# Altium PCB CP125-(12V2A)_Weld_V1.0.PcbDoc
Units mm, origin at the board's own origin, x right, y up, seen from the top; angles counter-clockwise.
Board outline 65 x 35 mm, 2 copper layers (Top Layer, Bottom Layer); 44 components, 28 nets, 104 pads, 0 vias.
Unrouted connection lines stored in the file: 75.
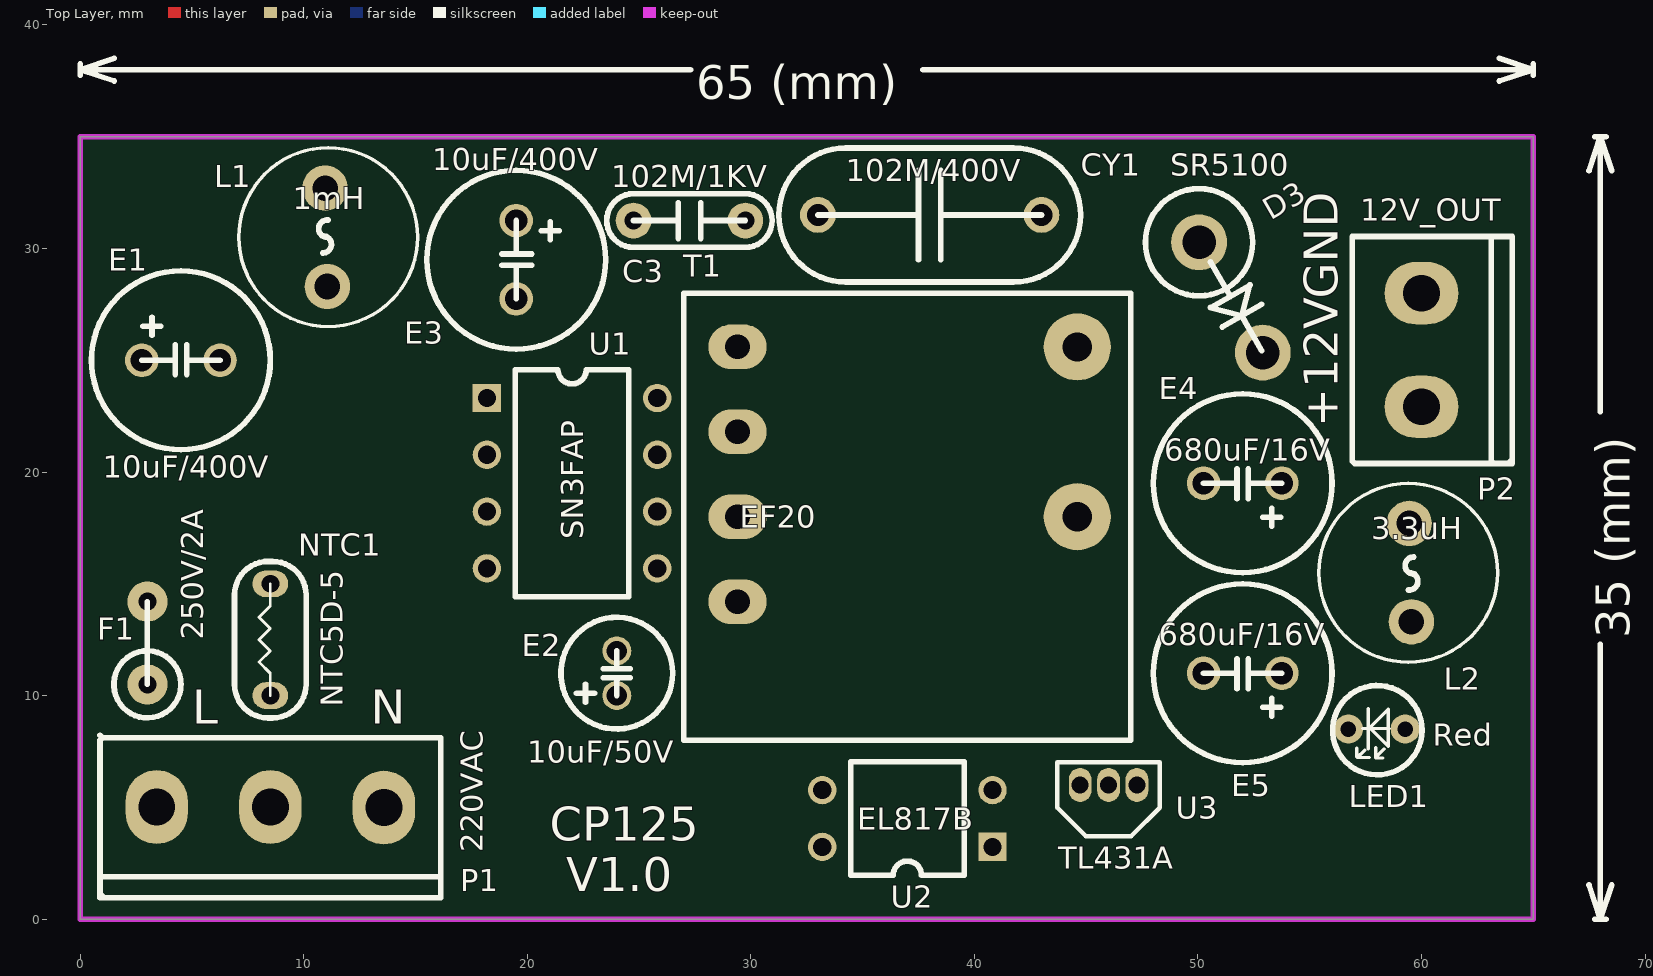
[diagram p0: Top Layer view]
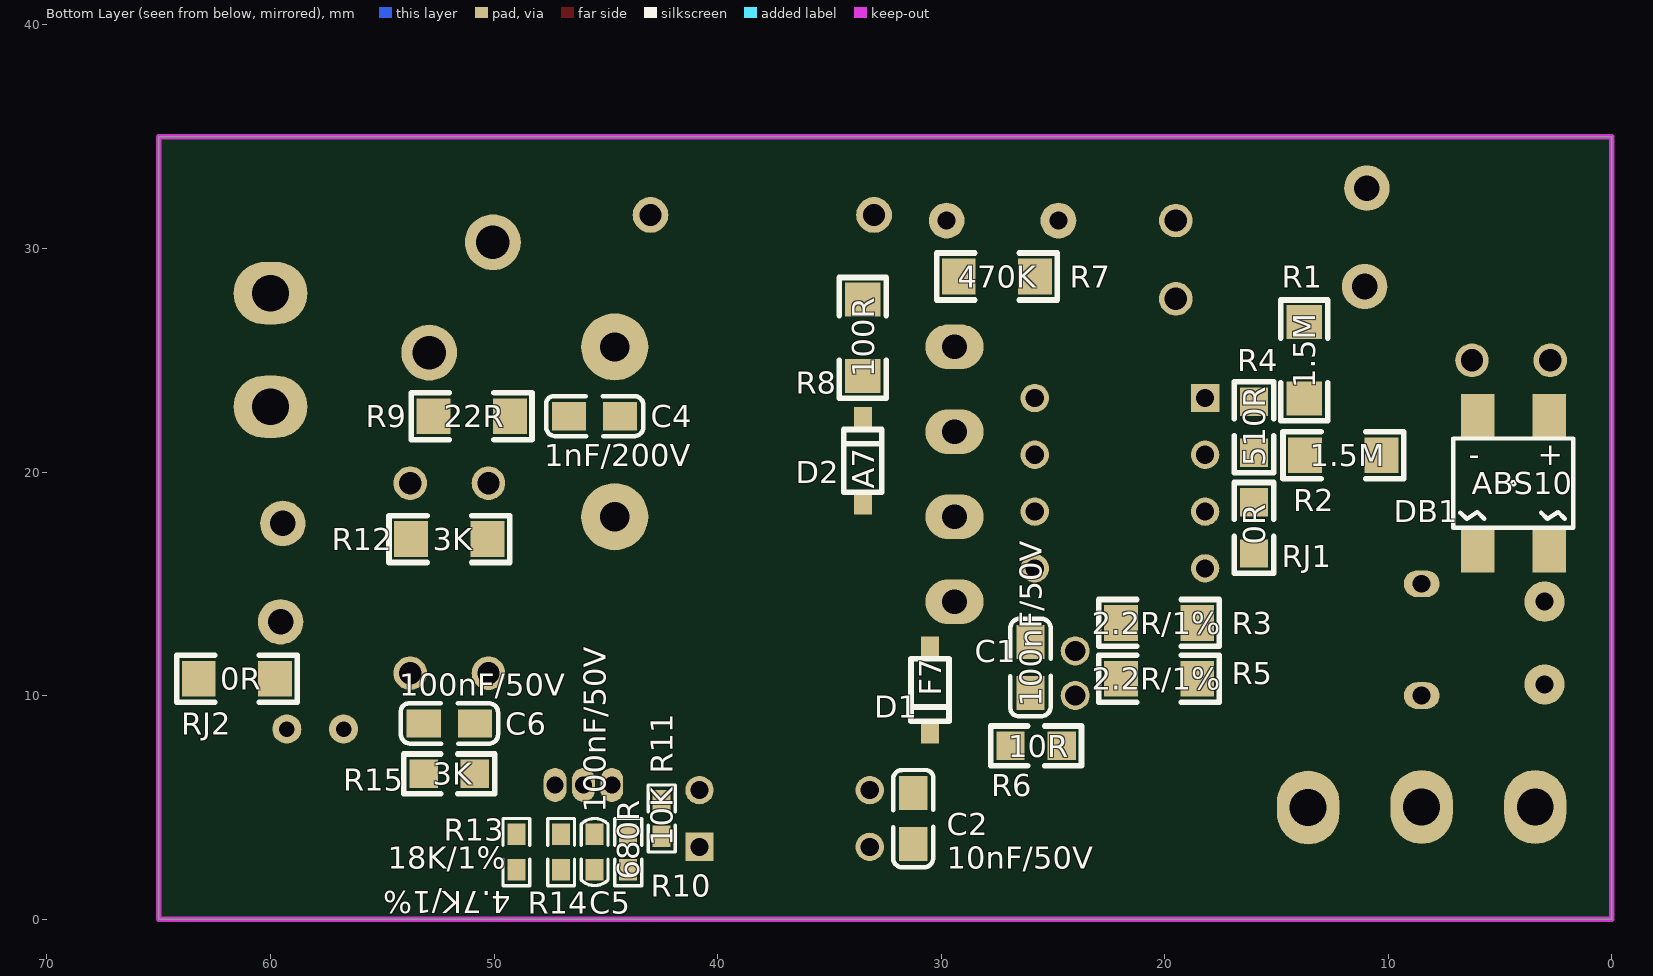
[diagram p1: Bottom Layer view, seen from below]

## Layer stack, top to bottom
Top Layer: signal copper 0.0356
Dielectric: dielectric 0.32, FR-4, Dk 4.8
Bottom Layer: signal copper 0.0356

## Board outline
0,0 65,0 65,35 0,35

## Design rules (kind name [scope] priority, off if disabled: settings)
Clearance [All] p1: gap=0.254
MinimumSolderMaskSliver [All] p1: minsoldermaskwidth=0
PolygonConnect [All] p1: connectstyle=Relief reliefconductorwidth=0.254 reliefentries=4 polygonreliefangle="90 Angle"
RoutingVias [All] p1: holewidth=0.711 width=1.27 viastyle="Through Hole" minholewidth=0.711 minwidth=1.27 maxholewidth=0.711 maxwidth=1.27
SilkToSilkClearance [All] p1: silktosilkclearance=0
SilkscreenOverComponentPads [All] p1: minsilkscreentomaskgap=0
SolderMaskExpansion [All] p1: expansion=0.102
Width [All] p1: maxlimit=100 minlimit=0.2 preferedwidth=0.254
25 further rules are at their usual default settings.

## Components (designator, comment, footprint, x,y, rotation, side; value= is the part's Value field where it differs from the comment)
C1 "100nF/50V" 0805_C1 26,11.25 r270 bottom
C2 "10nF/50V" 0805_C1 31.25,4.5 r90 bottom
C3 "102M/1KV" CY-5MM 27.25,31.25 r0 top
C4 "1nF/200V" 0805_C1 45.5,22.5 r0 bottom
C5 "100nF/50V" 0603_CN 45.5,3 r270 bottom
C6 "100nF/50V" 0805_C1 52,8.75 r0 bottom
CY1 "102M/400V" CY-10MM 38,31.5 r0 top
D1 "F7" SOD-123 30.5,10.25 r90 bottom
D2 "A7" SOD-123 33.5,20.5 r270 bottom
D3 "SR5100" DO-201AD-1 50.5,29.5 r300 top
DB1 "ABS10" ABS10 6,16.5 r90 bottom
E1 "10uF/400V" CS_470uF/16V 4.5,25 r0 top
E2 "10uF/50V" CS_47uF/25V 24,11 r90 top
E3 "10uF/400V" CS_470uF/16V 19.5,29.5 r270 top
E4 "680uF/16V" CS_220uF/25V 52,19.5 r180 top
E5 "680uF/16V" CS_220uF/25V 52,11 r180 top
F1 "250V/2A" FUSE3*10MM-A 3,10.5 r90 top
L1 "1mH" Inductance-8*10 11,30.5 r180 top
L2 "3.3uH" Inductance-8*10 59.5,15.5 r0 top
LED1 "Red" 3MM_LED 58,8.5 r180 top
NTC1 "NTC5D-5" NTC5D-5 8.5,12.5 r90 top
P1 "220VAC" KF5.08-3P 8.5,5 r180 top
P2 "12V_OUT" KF5.08-2P 60,28 r270 top
R1 "1.5M" 1206_R 13.75,25 r90 bottom
R2 "1.5M" 1206_R 12,20.75 r180 bottom
R3 "2.2R/1%" 1206_R 20.25,13.25 r180 bottom
R4 "510R" 0805_R 16,22 r270 bottom
R5 "2.2R/1%" 1206_R 20.25,10.75 r180 bottom
R6 "10R" 0805_R 25.75,7.75 r0 bottom
R7 "470K" 1206_R 27.5,28.75 r180 bottom
R8 "100R" 1206_R 33.5,26 r90 bottom
R9 "22R" 1206_R 51,22.5 r0 bottom
R10 "680R" 0603_RN 44,3 r90 bottom
R11 "10K" 0603_RN 42.5,4.5 r90 bottom
R12 "3K" 1206_R 52,17 r0 bottom
R13 "18K/1%" 0603_RN 49,3 r90 bottom
R14 "4.7K/1%" 0603_RN 47,3 r270 bottom
R15 "3K" 0805_R 52,6.5 r0 bottom
RJ1 "0R" 0805_R 16,17.5 r90 bottom
RJ2 "0R" 1206_R 61.5,10.75 r180 bottom
T1 "EF20" EF20-H-5+5 37,18 r0 top locked
U1 "SN3FAP" DIP-8 22,19.5 r0 top
U2 "EL817B" DIP-4 37,4.5 r180 top
U3 "TL431A" TO-92B 46,6 r180 top

## Footprints (in the part's own frame and the unit in brackets; to place one, negate y for a bottom-side part, rotate by r counter-clockwise, add the part's x,y. Pads: shape width x height; smd on the part's side, far side on the other; paste and mask are expansions set on the pad)
3MM_LED [mm] "PTH  LED,  PIN Spacing=3mm"
  round 1.3 hole 0.7: A(-1.27,0) K(1.27,0)
  silkscreen extent -2.02,-1.95 1.97,2.05
0603_CN [mm] "SMD Resistor"
  rect 0.96x0.8 smd: 1(-0.79,0) 2(0.79,0)
  silkscreen extent -1.5,-0.6 1.5,0.6
0603_RN [mm] "SMD Resistor"
  rect 0.96x0.8 smd: 1(-0.79,0) 2(0.79,0)
  silkscreen extent -1.5,-0.6 1.5,0.6
0805_C1 [mil]
  rect 60x50 smd: 1(-45,0) 2(45,0)
  silkscreen extent -86,-35 85,35
0805_R [mil] "SMD Resistor"
  rect 50x50 smd: 1(-45,0) 2(45,0)
  silkscreen extent -80,-35 80,35
1206_R [mm] "SMD Resistor"
  rect 1.52x1.6 smd: 1(-1.71,0) 2(1.71,0)
  silkscreen extent -2.7,-1.05 2.7,1.05
ABS10 [mm]
  rect 2x1.5 smd: 1(0,0) 2(0,-3.2) 3(6,-3.2) 4(6,0)
  silkscreen extent 1,-4.28 5,1.08
CS_47uF/25V [mm] "PTH  Electrolytic  Capacitor"
  round 1.3 hole 0.9: 1(-1,0) 2(1,0)
  silkscreen extent -2.5,-2.5 2.5,2.5
CS_220uF/25V [mm] "PTH  Electrolytic  Capacitor"
  round 1.5 hole 1: 1(-1.75,0) 2(1.75,0)
  silkscreen extent -4,-4 4,4
CS_470uF/16V [mm] "PTH  Electrolytic  Capacitor"
  round 1.5 hole 1: 1(-1.75,0) 2(1.75,0)
  silkscreen extent -4,-4 4,4
CY-5MM [mm]
  round 1.6 hole 0.8: 1(-2.5,0) 2(2.5,0)
  silkscreen extent -3.7,-1.2 3.7,1.2
CY-10MM [mm]
  round 1.6 hole 1: 1(-5,0) 2(5,0)
  silkscreen extent -6.75,-3 6.75,3
DIP-4 [mil]
  rect 50x50 hole 32: 1(-150,50)
  round 50 hole 32: 2(-150,-50) 3(150,-50) 4(150,50)
  silkscreen extent -100,-100 100,100
DIP-8 [mil]
  rect 50x50 hole 32: 1(-150,150)
  round 50 hole 32: 2(-150,50) 3(-150,-50) 4(-150,-150) 5(150,-150) 6(150,-50) 7(150,50) 8(150,150)
  silkscreen extent -100,-200 100,200
DO-201AD-1 [mm]
  round 2.5 hole 1.5: A(-0.9,0) K(4.8,0)
  silkscreen extent -3.3,-2.4 4.7,2.4
EF20-H-5+5 [mm] "EF20-horizontal-5+5"
  oval 2.6x2 hole 1.1: 1(-7.6,7.6) 2(-7.6,3.8) 3(-7.6,0) 4(-7.6,-3.8)
  round 3 hole 1.3: 8(7.6,0) 10(7.6,7.6)
  silkscreen extent -10,-10 10,10
FUSE3*10MM-A [mm]
  round 1.8 hole 0.8: 1(0,0) 2(3.7,0)
  silkscreen extent -1.5,-1.5 3.7,1.5
Inductance-8*10 [mil] "PTH Power Inductance,D=8mm,H=10mm"
  round 80 hole 45: 1(-1.97,86.61) 2(1.97,-86.61)
  silkscreen extent -161,-158 154,157
KF5.08-2P [mil]
  oval 110x130 hole 65: 1(0,0) 2(200,0)
  silkscreen extent -100,-122 300,160
KF5.08-3P [mil]
  oval 110x130 hole 65: 1(-200,0.5) 2(0,-0.5) 3(200,-0.5)
  silkscreen extent -300,-127 300,160
NTC5D-5 [mm]
  oval 1.2x1.6 hole 0.8: 1(-2.5,0) 2(2.5,0)
  silkscreen extent -3.5,-1.6 3.5,1.6
SOD-123 [mm] "SMD Diode"
  rect 1x0.8 smd: A(1.9,0) K(-1.9,0)
  silkscreen extent -1.4,-0.85 1.4,0.85
TO-92B [mil] "PTH Triode"
  oval 40x60 hole 30: 1(-50,0) 2(0,0) 3(50,0)
  silkscreen extent -90,-40 90,90

## Part data
C1 C2 C3 C4 C5 C6: library part Cap1
CY1: library part "Cap Y"
D1 D2 D3: library part Diode-A, "SS14,SS24,SS34,M7"
DB1: "0.8A/1000V"
E1 E2 E3 E4 E5: library part "Cap Pol1"
F1: library part FUSE1, "Fuse"
L1 L2: library part Inductor
LED1: library part LED
NTC1: library part "Res NTC"
P1: library part "Header 3", "Header, 3-Pin"
P2: library part "Header 2", "Header, 2-Pin"
R1 R2 R3 R4 R5 R6 R7 R8 R9 R10 R11 R12 R13 R14 R15 RJ1 RJ2: library part Res1
U2: library part PC817
U3: library part TL431

## Nets (pads, with @x,y where several pads share a name; then routed paths per layer and width w, separated by ;. In a path a pad name is that pad's centre, name@x,y a point inside that pad or via, vN(x,y) a via of type N, cw(c..) or ccw(c..) an arc to the next point about the centre after c; other vN are vias at no path point)
+12V: C6.2 E5.1 L2.2 LED1.A R13.2 RJ2.2
GND: C6.1 CY1.2 E4.2 E5.2 P2.1 R12.1 R14.1 R15.1 T1.8 U3.2
GND_P: C1.1 C2.2 DB1.4 E1.2 E2.2 E3.2 R3.1 R5.1 T1.2 U1.7 U1.8 U2.3
L: F1.1 P1.3
N: NTC1.1 P1.1
NetC1_2: C1.2 E2.1 R6.1 RJ1.1
NetC2_1: C2.1 U1.3 U2.4
NetC3_1: C3.1 CY1.1 E3.1 L1.2 R1.2 R7.2 T1.1
NetC3_2: C3.2 R7.1 R8.2
NetC4_1: C4.1 D3.A T1.10
NetC4_2: C4.2 R9.1
NetC5_1: C5.1 R11.2 U2.2 U3.3
NetC5_2: C5.2 R13.1 R14.2 U3.1
NetD1_A: D1.A T1.4
NetD1_K: D1.K R6.2
NetD2_A: D2.A T1.3 U1.5 U1.6
NetD2_K: D2.K R8.1
NetD3_K: D3.K E4.1 L2.1 R9.2 R10.1 R12.2
NetDB1_1: DB1.1 NTC1.2
NetDB1_2: DB1.2 F1.2
NetDB1_3: DB1.3 E1.1 L1.1
NetLED1_K: LED1.K R15.2
NetP2_2: P2.2 RJ2.1
NetR1_1: R1.1 R2.2
NetR2_1: R2.1 R4.2 RJ1.2 U1.2
NetR3_2: R3.2 R5.2 U1.4
NetR4_1: R4.1 U1.1
NetR10_2: R10.2 R11.1 U2.1
pads on no net: P1.2

## Keep-outs
Keep-Out Layer:
  the board outline again, w0.254

## Silkscreen, mask and mechanical layers (free items; w line width, h text height)
Top Overlay:
  lines w0.254: 0,37.746 0,38.254 ; 1.524,37.492 0,38 ; 1.524,38.508 0,38 ; 27.301,38 0,38 ; 37.699,38 65,38 ; 63.476,37.492 65,38 ; 63.476,38.508 65,38 ; 65,37.746 65,38.254 ; 67.492,1.524 68,0 ; 67.492,33.476 68,35 ; 67.746,0 68.254,0 ; 67.746,35 68.254,35 ; 68,12.301 68,0 ; 68,22.699 68,35 ; 68.508,1.524 68,0 ; 68.508,33.476 68,35
  text "65 (mm)" at 27.555,36.687 h1.52
  text "GND" at 56.25,27.75 h1.52 r90
  text "+12V" at 56.25,22 h1.52 r90
  text "35 (mm)" at 69.313,12.555 h1.52 r90
  text "L" at 5,8.75 h1.52
  text "N" at 13,8.75 h1.52
  text "CP125" at 21,3.5 h1.52
  text "V1.0" at 21.75,1.25 h1.52

## Text inside footprints (layer, text, board x,y; h text height)
DB1: Bottom Overlay "+" at 2.171,20.3 h1; Bottom Overlay "-" at 5.905,20.3 h1